# EAGLE board Layout (EAGLE 9.1.3)
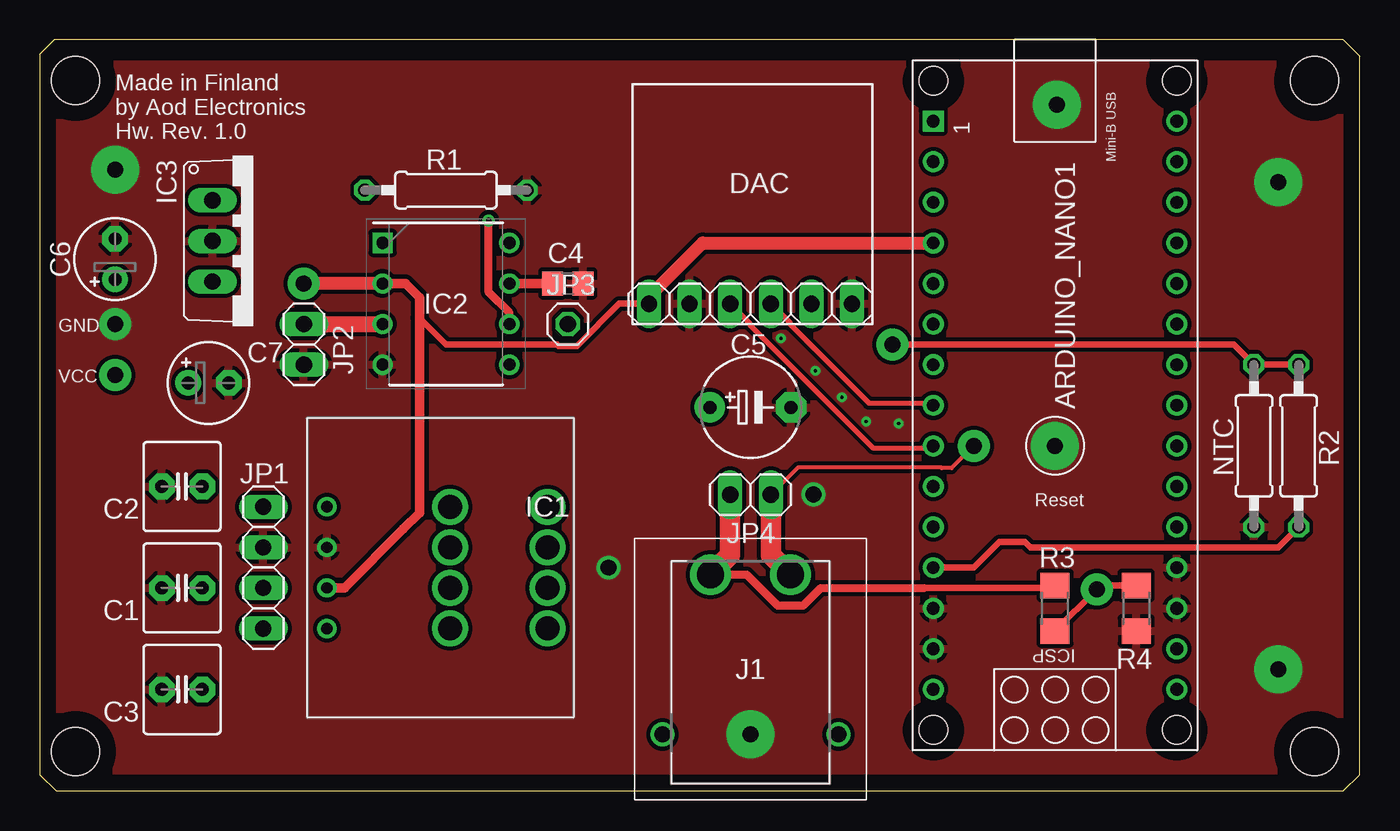
[diagram p0: board, top side]
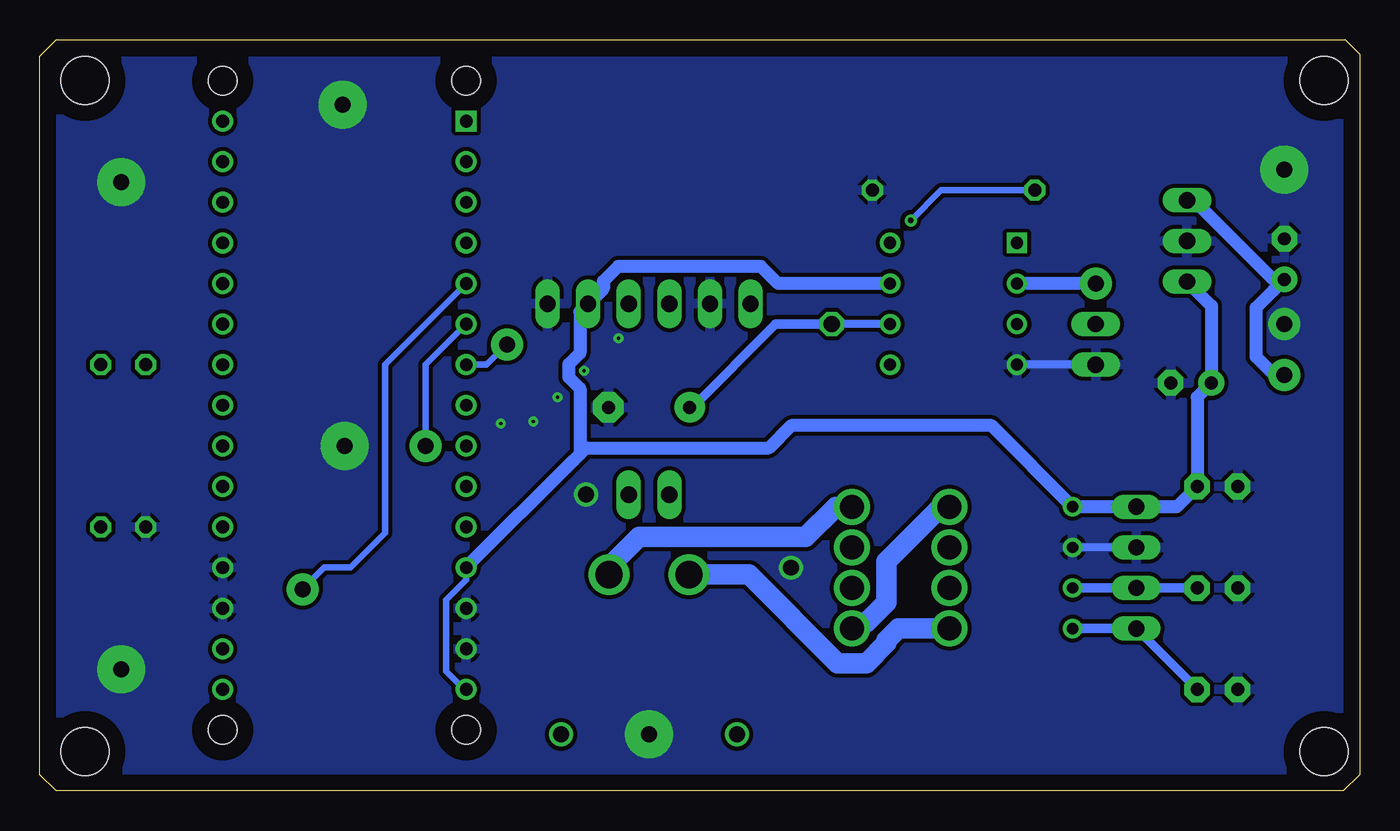
[diagram p1: board, bottom side, seen from below]

Size 82.55 x 46.99 mm. Coordinates in mm from the lower left corner, seen from the top.
Outline: 1.02,0 81.53,0 82.55,1.02 82.55,45.97 81.53,46.99 0.89,46.99 0,46.1 0,1.02 1.02,0
Copper layers (1*16): Top 0.035mm / dielectric 1.5mm / Bottom 0.035mm
Design rules "default *": minimum track width 6mil, minimum drill 0.35mm, track to track 10mil, track to pad 16mil, pad to pad 16mil, via to via 16mil, smd to smd 16mil, copper to edge 40mil, drill to drill 6mil, minimum pad ring 10mil, minimum via ring 8mil, stop-mask expansion 4mil, vias tented up to drill 0mil, thermal gap 10mil
Holes 3 mm at 2.23,44.46 2.23,2.46 79.73,2.46 79.73,44.46

## Footprints (pad centres in the part's own frame; a part is rotated, then mirrored left to right if it is on the bottom)
ARDUINO_NANO = drill 0.8 square: 1 -20.32,-7.62 | drill 0.8: 2 -17.78,-7.62; 3 -15.24,-7.62; 4 -12.7,-7.62; 5 -10.16,-7.62; 6 -7.62,-7.62; 7 -5.08,-7.62; 8 -2.54,-7.62; 9 0,-7.62; 10 2.54,-7.62; 11 5.08,-7.62; 12 7.62,-7.62; 13 10.16,-7.62; 14 12.7,-7.62; 15 15.24,-7.62; 16 15.24,7.62; 17 12.7,7.62; 18 10.16,7.62; 19 7.62,7.62; 20 5.08,7.62; 21 2.54,7.62; 22 0,7.62; 23 -2.54,7.62; 24 -5.08,7.62; 25 -7.62,7.62; 26 -10.16,7.62; 27 -12.7,7.62; 28 -15.24,7.62; 29 -17.78,7.62; 30 -20.32,7.62 | hole 1.778: -22.86,-7.62; -22.86,7.62; 17.78,7.62; 17.78,-7.62
C2.5-6 = drill 0.813 pad 1.6 octagon: 1 -1.27,0; 2 1.27,0
C0805 = smd 1.3 x 1.5: 1 -0.95,0; 2 0.95,0
E5-6 = drill 0.813 pad 1.905: + -2.54,0 | drill 0.813 pad 1.905 octagon: - 2.54,0
E2,5-5 = drill 0.813 pad 1.6: + -1.27,0 | drill 0.813 pad 1.6 octagon: - 1.27,0
1X06 = drill 1.016 long: 1 -6.35,0; 2 -3.81,0; 3 -1.27,0; 4 1.27,0; 5 3.81,0; 6 6.35,0
HXS_20-NP/SP30 = drill 1.5 pad 2: 1 0,0; 2 -6.1,0; 3 0,-2.54; 4 -6.1,-2.54; 5 0,-5.08; 6 -6.1,-5.08; 7 0,-7.62; 8 -6.1,-7.62 | drill 0.7 pad 1.2: 9 -13.8,0; 10 -13.8,-2.54; 11 -13.8,-5.08; 12 -13.8,-7.62
DIP794W56P254L959H533Q8N = drill 0.76 pad 1.16 square: 1 -3.97,3.81 | drill 0.76 pad 1.16: 2 -3.97,1.27; 3 -3.97,-1.27; 4 -3.97,-3.81; 5 3.97,-3.81; 6 3.97,-1.27; 7 3.97,1.27; 8 3.97,3.81
TO220V = drill 1.016 long: 1 -2.54,-2.54; 2 0,-2.54; 3 2.54,-2.54
XT30PWM = drill 1.7 pad 2.55: 1 -2.5,-5.912; 2 2.5,-5.912 | drill 1 pad 1.5: 3 5.5,4.088; 4 -5.5,4.088
1X04 = drill 1.016 long: 1 -3.81,0; 2 -1.27,0; 3 1.27,0; 4 3.81,0
1X02 = drill 1.016 long: 1 -1.27,0; 2 1.27,0
1X01 = drill 1.016 octagon: 1 0,0
0207/10 = drill 0.813 octagon: 1 -5.08,0; 2 5.08,0
R1206 = smd 1.6 x 1.803: 1 -1.422,0; 2 1.422,0

## Placement (x,y rotation side)
ARDUINO_NANO1  [ARDUINO_NANO]  63.5,21.59 270 top
C1  47n  [C2.5-6]  8.89,12.7 180 top
C2  47n  [C2.5-6]  8.89,19.05 180 top
C3  47n  [C2.5-6]  8.89,6.35 180 top
C4  [C0805]  33.02,31.75 0 top
C5  [E5-6]  44.45,24 0 top
C6  [E2,5-5]  4.7,33.27 90 top
C7  [E2,5-5]  10.54,25.53 0 top
DAC  [1X06]  44.45,30.48 0 top
IC1  HXS_20-NP_SP30  [HXS_20-NP/SP30]  31.75,17.78 0 top
IC2  AD829JNZ  [DIP794W56P254L959H533Q8N]  25.4,30.48 0 top
IC3  7805TV  [TO220V]  13.34,34.42 270 top
J1  XT30PW-M  [XT30PWM]  44.45,7.62 180 top
JP1  [1X04]  13.97,13.97 270 top
JP2  [1X02]  16.51,27.94 270 top
JP3  [1X01]  33.02,29.21 0 top
JP4  [1X02]  44.45,18.54 0 top
NTC  [0207/10]  75.95,21.59 90 top
R1  [0207/10]  25.4,37.59 180 top
R2  [0207/10]  78.74,21.59 270 top
R3  [R1206]  63.5,11.43 90 top
R4  [R1206]  68.58,11.43 90 top

## Library data of the parts
ARDUINO_NANO1 = ArduinoNanoV30
C1-C3 = capacitor-wima
C4-C7 = rcl; SPICEPREFIX: C
DAC JP1-JP4 = pinhead
IC1 = HXS_20-NP_SP30; ALLIED_NUMBER: R1039471; ALLIED_PRICE-STOCK: http://www.alliedelec.com/lem-hxs-20-np-sp30/R1039471/; DESCRIPTION: Open Loop Hall Effect Current Transducer, ??60 A, 5 V; HEIGHT: mm; MANUFACTURER_NAME: LEM; MANUFACTURER_PART_NUMBER: HXS 20-NP/SP30; RS_PART_NUMBER: 5329110; RS_PRICE-STOCK: http://uk.rs-online.com/web/p/products/5329110
IC2 = AD829JNZ; DESCRIPTION: AD829JNZ, Video Amplifier, 8-Pin PDIP; HEIGHT: 5.33mm; MANUFACTURER_NAME: Analog Devices; MANUFACTURER_PART_NUMBER: AD829JNZ; MOUSER_PART_NUMBER: 584-AD829JNZ; MOUSER_PRICE-STOCK: https://www.mouser.com/Search/Refine.aspx?Keyword=584-AD829JNZ; RS_PART_NUMBER: 5228512; RS_PRICE-STOCK: http://uk.rs-online.com/web/p/video-amplifier-ics/5228512/?source=DS
IC3 = linear
J1 = XT30PW-M; DESCRIPTION: 30A Low Temperature Rise Fire Retardant Plug; HEIGHT: 5mm; MANUFACTURER_NAME: Amass; MANUFACTURER_PART_NUMBER: XT30PW-M
NTC R1 R2 = eagle-ltspice; SPICEMODEL: NONE; SPICEPREFIX: R
R3 R4 = resistor

## Nets
2: IC1.2 IC1.7
GND: ARDUINO_NANO1.13 ARDUINO_NANO1.14 ARDUINO_NANO1.18 ARDUINO_NANO1.19 C1.2 C2.2 C3.2 C4.2 C5.- C6.- C7.- DAC.2 DAC.6 IC1.10 IC2.4 IC3.2 JP1.2 JP2.2 NTC.1 R1.1 R4.1
IN+: ARDUINO_NANO1.6 IC1.1 J1.1 JP4.2
IN-: IC1.8 J1.2 JP4.1 R3.2
N$1: C5.+ IC2.6 JP3.1 R1.2
N$4: ARDUINO_NANO1.5 R3.1 R4.2
N$5: IC2.3 JP2.1
N$6: ARDUINO_NANO1.7 NTC.2 R2.1
OUT: ARDUINO_NANO1.4 C1.1 DAC.1 IC1.11 IC2.2 JP1.3
REF: C3.1 IC1.12 JP1.4
SCL: ARDUINO_NANO1.9 DAC.3
SDA: ARDUINO_NANO1.8 DAC.4
VCC: ARDUINO_NANO1.12 ARDUINO_NANO1.15 C2.1 C4.1 C7.+ DAC.5 IC1.9 IC2.7 IC3.3 JP1.1 R2.2
VI: C6.+ IC3.1

## Tracks (layer width: path | path; a pad name or v marks a point on that pad's centre or on a via)
2
  Bottom 1.27: IC1.7 31.38,10.53 30.85,10.53 29.58,11.8 29.58,14.37 26.17,17.78 IC1.2
GND  (via drill 0.2, 1 pad 1.3, 1 pad 2, 1 pad 3)
  Bottom 0.508: JP1.2 IC1.10 | JP2.2 IC2.4
  other vias: 77.47,7.62 44.45,3.56 63.5,21.59 4.7,38.86 35.56,13.97 48.39,18.54 4.7,29.21 77.47,38.1 63.63,42.93 53.72,22.99 51.69,23.11 50.16,24.64 48.51,26.29 46.35,28.32
  pour Top: 0,0 0,45.47 81.92,45.47 81.92,0
  pour Bottom: 0,0 0,45.72 82.42,45.72 82.42,0
IN+  (via drill 1 pad 2)
  Top 0.254: v58.42,21.59 57.02,20.19 56.42,20.19 56.37,20.24 47.41,20.24 JP4.2
  Top 1.27: JP4.2 45.72,14.76 J1.1
  Bottom 0.406: v58.42,21.59 58.42,26.67 ARDUINO_NANO1.6
  Bottom 1.27: J1.1 46.95,14.01 45.08,15.88 34.66,15.88 32.77,17.78 IC1.1
IN-
  Top 0.406: R3.2 63.35,12.7 55.29,12.7
  Top 0.508: J1.2 44.21,13.53 46.15,11.6 47.75,11.6 48.85,12.7 55.29,12.7
  Top 1.016: J1.2 41.91,13.57
  Top 1.27: JP4.1 43.18,14.76 J1.2
  Bottom 1.27: IC1.8 28.86,10.16 29.58,9.43 29.58,9.26 30.85,7.99 32.65,7.99 38.19,13.53 J1.2
N$1  (via drill 0.35)
  Top 0.508: IC2.6 29.37,29.92 28.08,31.21 v28.08,35.7
  Bottom 0.406: R1.2 26.18,37.59 v28.08,35.7
  Bottom 0.508: IC2.6 JP3.1
  Bottom 0.61: JP3.1 36.52,29.21 41.73,24 C5.+
N$4  (via drill 1 pad 2)
  Top 0.406: R3.1 v66.12,12.62 66.34,12.85 R4.2
  Bottom 0.406: v66.12,12.62 64.77,13.97 63.12,13.97 60.96,16.13 60.96,26.67 ARDUINO_NANO1.5
N$5
  Top 1.016: JP2.1 IC2.3
N$6  (via drill 1 pad 2)
  Top 0.406: R2.1 NTC.2 74.68,27.94 v53.34,27.94
  Bottom 0.406: v53.34,27.94 54.61,26.67 ARDUINO_NANO1.7
OUT  (via drill 1 pad 2)
  Top 0.406: DAC.1 36.23,30.48 33.59,27.84 32.45,27.84 32.35,27.94 25.4,27.94 24.13,29.21 23.75,29.59
  Top 0.61: IC1.11 19.05,12.7 22.73,16.38 23.75,17.4 23.75,29.59 23.75,30.86 22.86,31.75 IC2.2
  Top 0.813: IC2.2 v16.51,31.75 | ARDUINO_NANO1.4 41.46,34.29 38.1,30.93 DAC.1
  Bottom 0.61: C1.1 JP1.3 IC1.11
  Bottom 0.813: v16.51,31.75 IC2.2
REF
  Bottom 0.61: C3.1 JP1.4 IC1.12
SCL
  Top 0.305: DAC.3 44.4,29.26 44.4,29.17 52.11,21.46 55.75,21.46 ARDUINO_NANO1.9
SDA
  Top 0.305: DAC.4 46.94,29.26 46.94,29.17 51.85,24.26 55.75,24.26 ARDUINO_NANO1.8
VCC
  Top 0.406: 31.75,31.75 C4.1 | ARDUINO_NANO1.12 58.42,13.97 60.03,15.58 61.63,15.58 61.97,15.24 77.47,15.24 R2.2
  Top 0.61: IC2.7 31.75,31.75
  Bottom 0.406: ARDUINO_NANO1.12 55.88,13.22 57.14,11.95 57.14,7.5 57.15,7.49 56.01,6.35 ARDUINO_NANO1.15
  Bottom 0.813: IC2.7 36.38,31.75 37.45,32.82 46.37,32.82 47.29,31.89 47.29,31.45 DAC.5 48.77,29.97 48.77,27.4 49.48,26.69 49.48,25.89 48.77,25.18 48.77,21.08 | IC3.3 9.27,30.35 C7.+ 10.16,24.64 C2.1 11.43,17.78 JP1.1 IC1.9 23.03,22.86 35.56,22.86 36.96,21.46 48.39,21.46 48.77,21.08 | ARDUINO_NANO1.12 49.15,20.7 48.77,21.08
VI  (via drill 1 pad 2)
  Bottom 0.813: C6.+ 5.39,32 10.27,36.88 10.59,36.88 10.67,36.96 IC3.1 | 5.37,31.33 C6.+ | C6.+ 6.48,30.23 6.48,27.18 5.33,26.04 v4.7,26.04

## Text on the board
tPlace: Made in Finland / by Aod Electronics / Hw. Rev. 1.0 | GND | VCC